# Altium PCB main_pcb_v0.PcbDoc (part 1 of 2)
Units mil, origin at the board's own origin, x right, y up, seen from the top; angles counter-clockwise.
Board outline 9550 x 4600 mil, 2 copper layers (Top Layer, Bottom Layer); 82 components, 133 nets, 564 pads, 44 vias.
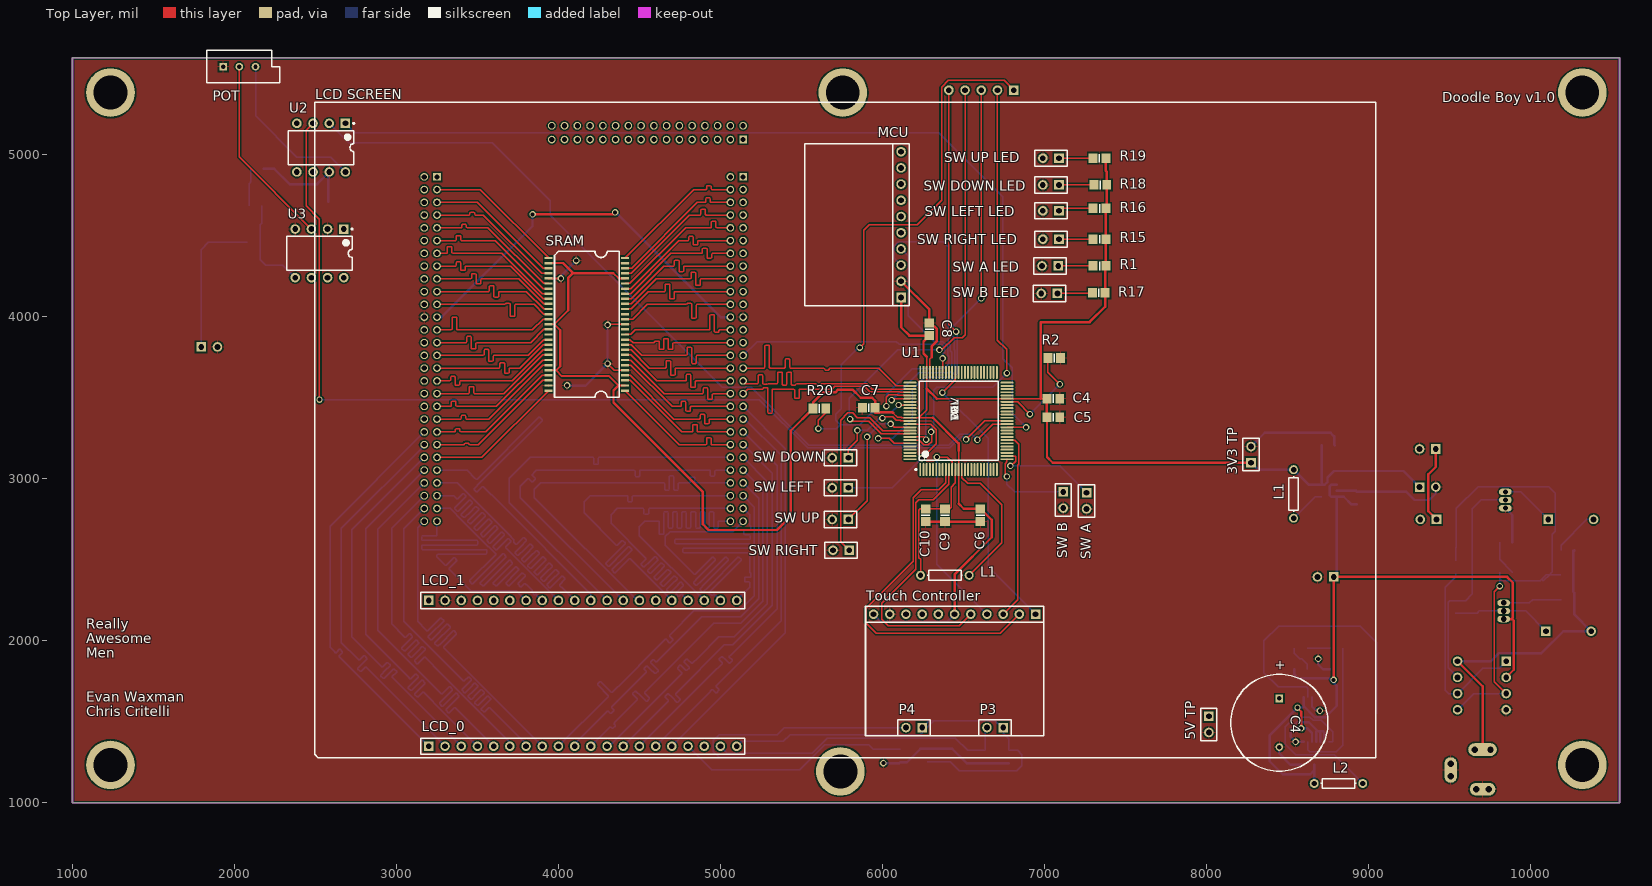
[diagram p0: Top Layer view]
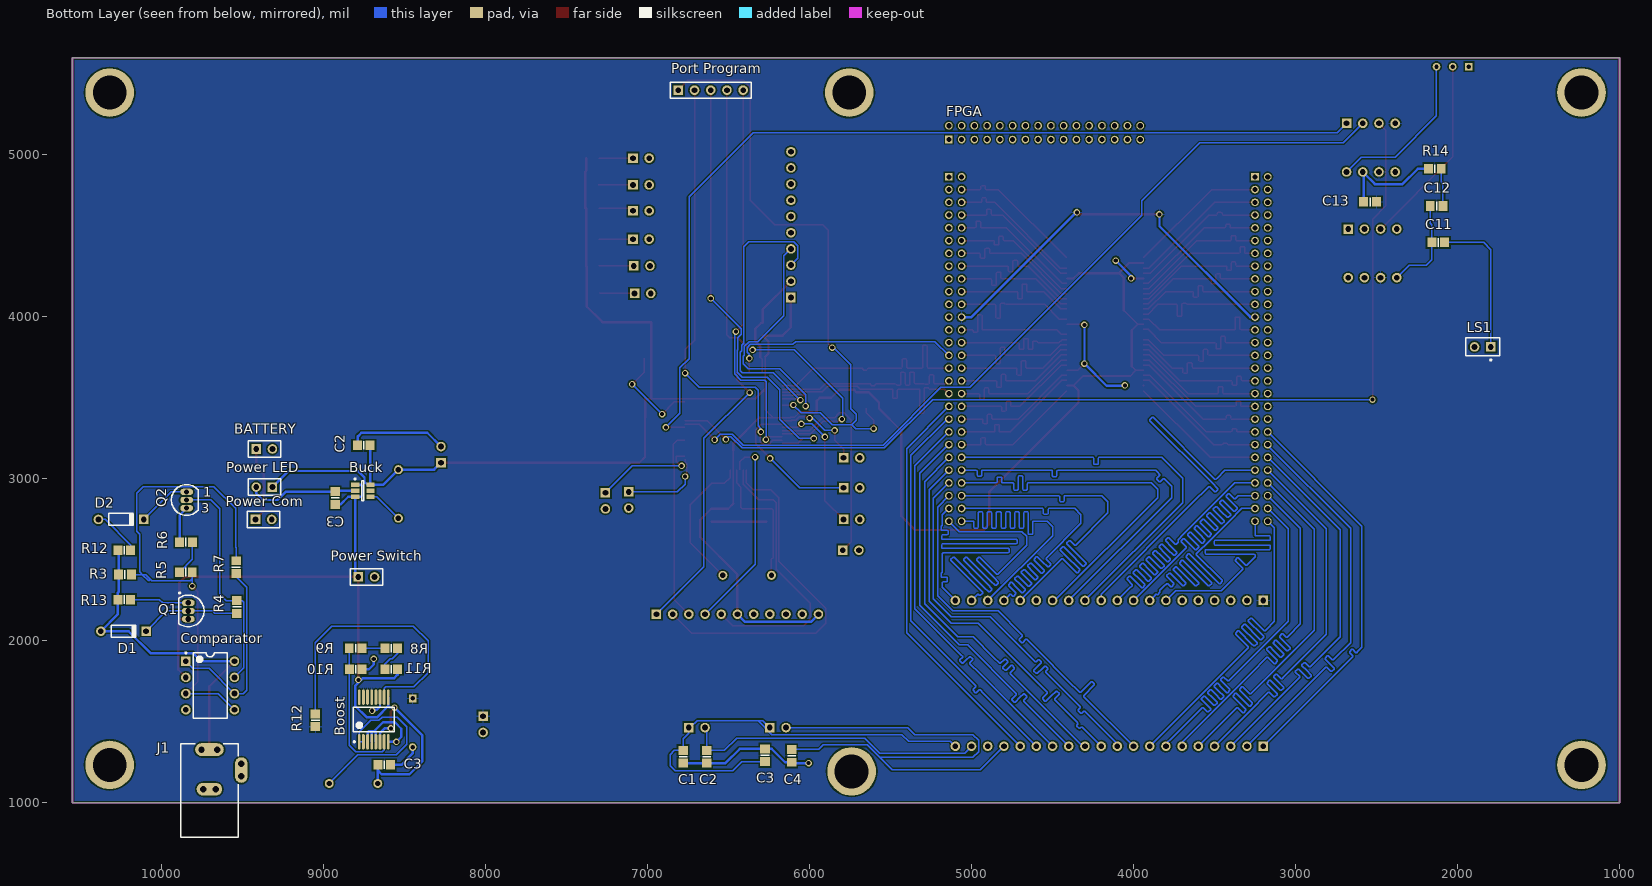
[diagram p1: Bottom Layer view, seen from below]

## Layer stack, top to bottom
Top Solder: solder mask 0.4, Solder Resist, Dk 3.5
Top Layer: signal copper 1.4
Dielectric 1: dielectric 12.6, FR-4, Dk 4.8
Bottom Layer: signal copper 1.4
Bottom Solder: solder mask 0.4, Solder Resist, Dk 3.5

## Board outline
1000,1015 1000,5600 10550,5600 10550,1000 1000,1000

## Design rules (kind name [scope] priority, off if disabled: settings)
Clearance [All] p1: gap=9 ignorepadtopadclearanceinfootprint=TRUE
HoleSize [All] p1: absolutevalues=TRUE maxlimit=240 minlimit=1 maxpercent=80.000 minpercent=20.000
MatchedLengths sram_match_length_2 [InNetClass('SRAM_net')] p1: tolerance=10 checknetsindiffpair=FALSE checkdiffpairvsdiffpair=TRUE checkxsignals=TRUE checkothers=TRUE
MatchedLengths lcd_match_length_1 [InNetClass('LCD_net')] p2: tolerance=10 checknetsindiffpair=FALSE checkdiffpairvsdiffpair=TRUE checkxsignals=TRUE checkothers=TRUE
MatchedLengths lcd_spi_match_length [InNetClass('FPGA_SPI_net')] p3: tolerance=10 checknetsindiffpair=FALSE checkdiffpairvsdiffpair=TRUE checkxsignals=TRUE checkothers=TRUE
MinimumSolderMaskSliver [All] p1 off: minsoldermaskwidth=10
PolygonConnect [All] p1: connectstyle=Relief reliefconductorwidth=10 reliefentries=4 polygonreliefangle="90 Angle" airgapwidth=10
RoutingCorners [All] p1: cornerstyle=Round minsetback=1000 maxsetback=1000
RoutingVias [All] p1: holewidth=25 width=40 viastyle="Through Hole" minholewidth=25 minwidth=40 maxholewidth=25 maxwidth=40
SMDNeckDown [InNet('3V3')] p1: percent=80.000
SilkToSolderMaskClearance [IsPad] p1 off: minsilkscreentomaskgap=2.5 clearancetoexposedcopper=TRUE
SolderMaskExpansion [All] p1: expansion=4
Width Power_common_width [InNet('Power_Common')] p1: maxlimit=15 minlimit=7 preferedwidth=15
Width 12V_width [InNet('12V')] p2: maxlimit=15 minlimit=7 preferedwidth=15
Width V_BAT_width [InNet('V_BAT')] p3: maxlimit=15 minlimit=7 preferedwidth=15
Width 3V3_width [InNet('3V3')] p4: maxlimit=15 minlimit=7 preferedwidth=15
Width [All] p5: maxlimit=15 minlimit=7 preferedwidth=8
26 further rules are at their usual default settings.

## Classes and differential pairs
net class AUTO_ROUTE_net: 3V3 12V DAC_CS DAC_DIN DAC_SCK FPGA_MISO FPGA_MOSI FPGA_SCLK FPGA_SS IMU_SCL IMU_SDA LBI NetBoost_1 NetBoost_10 NetBuck_4 NetC9_2 NetC11_1 NetC11_2 NetC12_1 NetComparator_1 NetComparator_3 NetComparator_7 NetD1_2 NetD2_1 NetD2_2 NetPOT_2 NetPOT_3 NetQ1_1 NetR1_2 NetR2_1 NetR5_1 NetR8_1 NetR8_2 NetR15_2 NetR16_2 NetR17_2 NetR18_2 NetR19_2 Power_Common RST_NMI_N SWCLKTCK SWDIOTMS switch_A switch_B switch_DOWN switch_LEFT switch_RIGHT switch_UP TDI_ADC14CLK TDO_SWO TOUCH_INT TOUCH_SCL TOUCH_SDA/CS TOUCH_SDI TOUCH_SDO V_BAT VSW XL XR YD YU
net class FPGA_SPI_net: FPGA_MISO FPGA_MOSI FPGA_SCLK FPGA_SS
net class SRAM_net: /BHE /BLE /CE /OE /WE A0 A1 A2 A3 A4 A5 A6 A7 A8 A9 A10 A11 A12 A13 A14 A15 A16 A17 A18 A19 IO0 IO1 IO2 IO3 IO4 IO5 IO6 IO7 IO8 IO9 IO10 IO11 IO12 IO13 IO14 IO15
net class LCD_net: BLUE0 BLUE1 BLUE2 BLUE3 BLUE4 BLUE5 BLUE6 BLUE7 CLK_pixel DE GREEN0 GREEN1 GREEN2 GREEN3 GREEN4 GREEN5 GREEN6 GREEN7 HSYNC ON/OFF RED0 RED1 RED2 RED3 RED4 RED5 RED6 RED7 VSYNC
component class dac_audio_out: C11 C12 C13 LS1 POT R14 U2 U3
component class MSPBreakout: C4 C5 C6 C7 C8 C9 C10 L1 MCU "Port Program" R1 R2 R15 R16 R17 R18 R19 R20 "SW A" "SW A LED" "SW B" "SW B LED" "SW DOWN" "SW DOWN LED" "SW LEFT" "SW LEFT LED" "SW RIGHT" "SW RIGHT LED" "SW UP" "SW UP LED" U1
component class BatteryRecharge2: "3V3 TP" "5V TP" BATTERY Boost Buck C2 C3 C4 Comparator D1 D2 J1 L1 L2 "Power Com" "Power LED" "Power Switch" Q1 Q2 R3 R4 R5 R6 R7 R8 R9 R10 R11 R12 R13
component class lcd_breakout: C1 C2 C3 C4 LCD_0 LCD_1 P3 P4 P? "Touch Controller"
component class fpga_sram: FPGA SRAM

## Components (designator, comment, footprint, x,y, rotation, side; value= is the part's Value field where it differs from the comment)
"3V3 TP" "V_BUCK_OUT_HEAD" HDR1X2 8275,3100 r90 top
"5V TP" "V_BOOST_OUT_HEAD" HDR1X2 8015,1535 r270 top
BATTERY "BATTERY HEAD" HDR1X2 9415.63,3185 r180 bottom
Boost "Header 8X2A" SSOP16_M 8690,1515.2 r90 bottom
Buck "Header 3X2A" SOT23-6_M 8757.76,2927.6 r180 bottom
C1 "Cap" 6-0805_M 6780,1285.63 r90 bottom value=10nF
C2 "Cap" 6-0805_M 8752.13,3207.6 r180 bottom value=10uF
C2 "Cap" 6-0805_M 6635,1285.63 r90 bottom value=10nF
C3 "Cap Pol1" 6-0805_M 8625,1235.2 r180 bottom value=10uF
C3 "Cap" 6-0805_M 8927.76,2882.6 r270 bottom value=4.7uF
C3 "Cap" 6-0805_M 6275,1294.37 r270 bottom value=10nF
C4 "Cap Pol1" RB7.6-15 8450,1495 r90 top value=270uF
C4 "Cap" 6-0805_M 7055,3496.06 r180 top value=100nF
C4 "Cap" 6-0805_M 6110,1290.63 r90 bottom value=10nF
C5 "Cap" 6-0805_M 7055,3381.06 r180 top value=100nF
C6 "Cap Pol1" 6-0805_M 6605,2776.38 r270 top value=10uF
C7 "Cap" 6-0805_M 5915,3440 r0 top value=100nF
C8 "Cap" 6-0805_M 6290,3924.37 r270 top value=100nF
C9 "Cap" 6-0805_M 6386.06,2776.38 r90 top value=100nF
C10 "Cap" 6-0805_M 6266.06,2776.38 r90 top value=4uF
C11 "Cap Pol1" 6-0805_M 2119.37,4460 r180 bottom value=270uF
C12 "Cap" 6-0805_M 2129.37,4685 r0 bottom value=0.047uF
C13 "Cap" 6-0805_M 2540,4710 r0 bottom value=0.1uF
Comparator "LT1017CN8" LT-N8 9700,1725 r180 bottom
D1 "Diode 1N914" DO-35 10235,2060 r180 bottom
D2 "Diode 1N914" DO-35 10250,2750 r180 bottom
FPGA "CoreEP3C16" CoreEP3C16 5140,4865 r180 bottom
J1 "PWR2.5" KLD-0202 9704.37,789.72 r90 bottom
L1 "Inductor" AXIAL-0.3 8537.76,2907.6 r90 top value=10uH
L1 "Inductor" AXIAL-0.3 6385,2405 r180 top value=4.7uH
L2 "Inductor" AXIAL-0.3 8815,1120.2 r0 top value=10uH
LCD_0 "Header 20" HDR1X20 3200,1350 r0 top
LCD_1 "Header 20" HDR1X20 3200,2250 r0 top
LS1 "Speaker" PIN2 1795,3815 r0 bottom
MCU "Header 10" HDR1X10 6115,4120 r90 top
P3 "Header 2" HDR1X2 6745,1465 r180 top
P4 "Header 2" HDR1X2 6245,1465 r180 top
"Port Program" "Header 5" HDR1X5 6810,5400 r180 bottom
POT "RPot_3" VR5 2030,5545 r0 top value=10K
"Power Com" "Header 2" HDR1X2 9420,2750 r180 bottom
"Power LED" "Header 2" HDR1X2 9315.63,2950 r0 bottom
"Power Switch" "Header 2" HDR1X2 8785,2395 r180 bottom
Q1 "2N3906" TO-92A 9835,2185 r0 bottom
Q2 "2N7000" SOT54 9845,2870 r180 bottom
R1 "Res1" 6-0805_M 7340,4315 r180 top value=1K
R2 "Res1" 6-0805_M 7060.63,3746.38 r0 top value=91K
R3 "Res1" 6-0805_M 10225.63,2410 r0 bottom value=5000
R4 "Res1" 6-0805_M 9535,2210 r270 bottom value=510
R5 "Res1" 6-0805_M 9850,2425 r180 bottom value=2000
R6 "Res1" 6-0805_M 9849.37,2610 r180 bottom value=560
R7 "Res1" 6-0805_M 9540,2455.63 r270 bottom value=100K
R8 "Res1" 6-0805_M 8582.13,1955.2 r180 bottom value=1M
R9 "Res1" 6-0805_M 8802.13,1955.2 r180 bottom value=470K
R10 "Res1" 6-0805_M 8800.87,1825.2 r0 bottom value=330K
R11 "Res1" 6-0805_M 8582.13,1825.2 r180 bottom value=1M
R12 "Res1" 6-0805_M 9050,1510 r90 bottom value=100K
R12 "Res1" 6-0805_M 10230,2560 r180 bottom value=1K
R13 "Res1" 6-0805_M 10230,2255 r0 bottom value=39
R14 "Res1" 6-0805_M 2140,4915 r180 bottom value=10
R15 "Res1" 6-0805_M 7340,4480 r180 top value=1K
R16 "Res1" 6-0805_M 7340,4670 r180 top value=1K
R17 "Res1" 6-0805_M 7335.63,4149.05 r180 top value=1K
R18 "Res1" 6-0805_M 7345,4815 r180 top value=1K
R19 "Res1" 6-0805_M 7339.37,4980 r180 top value=1K
R20 "Res1" 6-0805_M 5610.63,3435 r180 top value=47K
SRAM "CY7C10612G30" TSOP54 4175.28,3954.61 r270 top
"SW A" "Header 2" HDR1X2 7260,2915 r270 top
"SW A LED" "Header 2" HDR1X2 7085,4315 r180 top
"SW B" "Header 2" HDR1X2 7116.26,2920 r270 top
"SW B LED" "Header 2" HDR1X2 7080,4145 r180 top
"SW DOWN" "Header 2" HDR1X2 5790,3130 r180 top
"SW DOWN LED" "Header 2" HDR1X2 7090,4815 r180 top
"SW LEFT" "Header 2" HDR1X2 5790,2945 r180 top
"SW LEFT LED" "Header 2" HDR1X2 7090,4655 r180 top
"SW RIGHT" "Header 2" HDR1X2 5795,2560 r180 top
"SW RIGHT LED" "Header 2" HDR1X2 7090,4480 r180 top
"SW UP" "Header 2" HDR1X2 5790,2750 r180 top
"SW UP LED" "Header 2" HDR1X2 7090,4980 r180 top
"Touch Controller" "Header 11" HDR1X11 6945,2165 r180 top
U1 "XMS432P401RIPZR" PZ0100A_M 6469.8,3357.95 r90 top value=Value
U2 "LT1661" DIP-8 2535,5045 r270 top
U3 "LM386N-1" DIP-8 2525,4392.56 r270 top

## Footprints (in the part's own frame and the unit in brackets; to place one, negate y for a bottom-side part, rotate by r counter-clockwise, add the part's x,y. Pads: shape width x height; smd on the part's side, far side on the other; paste and mask are expansions set on the pad)
6-0805_M [mm] "Chip Resistor, Body 2.0x1.2mm, IPC Low Density"
  rect 1.4x1.5 smd: 1(-1,0) 2(1,0)
  silkscreen extent 0,-0.65 0,0.65, body extent -1.07,-0.7 1.07,0.7, height 0.7
AXIAL-0.3 [mm] "Axial Device, Thru-Hole; 2 Leads; 0.3 in Pin Spacing"
  round 1.4 hole 0.85: 1(-3.81,0) 2(3.81,0)
  silkscreen extent -2.77,-0.76 2.77,0.76
CoreEP3C16 [mm]
  rect 1.2x1.2 hole 0.8: 1(0,0) 57(0,5.842) 89(48,0)
  round 1.2 hole 0.8: 2(2,0) 3(0,-2) 4(2,-2) 5(0,-4) 6(2,-4) 7(0,-6) 8(2,-6) 9(0,-8) 10(2,-8) 11(0,-10) 12(2,-10) 13(0,-12) 14(2,-12) 15(0,-14) 16(2,-14) 17(0,-16) 18(2,-16) 19(0,-18) 20(2,-18) 21(0,-20) 22(2,-20) 23(0,-22) 24(2,-22) 25(0,-24) 26(2,-24) 27(0,-26) 28(2,-26) 29(0,-28) 30(2,-28) 31(0,-30) 32(2,-30) 33(0,-32) 34(2,-32) 35(0,-34) 36(2,-34) 37(0,-36) 38(2,-36) 39(0,-38) 40(2,-38) 41(0,-40) 42(2,-40) 43(0,-42) 44(2,-42) 45(0,-44) 46(2,-44) 47(0,-46) 48(2,-46) 49(0,-48) 50(2,-48) 51(0,-50) 52(2,-50) 53(0,-52) 54(2,-52) 55(0,-54) 56(2,-54) 58(0,8) 59(2,5.842) 60(2,8) 61(4,5.842) 62(4,8) 63(6,5.842) 64(6,8) 65(8,5.842) 66(8,8) 67(10,5.842) 68(10,8) 69(12,5.842) 70(12,8) 71(14,5.842) 72(14,8) 73(16,5.842) 74(16,8) 75(18,5.842) 76(18,8) 77(20,5.842) 78(20,8) 79(22,5.842) 80(22,8) 81(24,5.842) 82(24,8) 83(26,5.842) 84(26,8) 85(28,5.842) 86(28,8) 87(30,5.842) 88(30,8) 90(50,0) 91(48,-2) 92(50,-2) 93(48,-4) 94(50,-4) 95(48,-6) 96(50,-6) 97(48,-8) 98(50,-8) 99(48,-10) 100(50,-10) 101(48,-12) 102(50,-12) 103(48,-14) 104(50,-14) 105(48,-16) 106(50,-16) 107(48,-18) 108(50,-18) 109(48,-20) 110(50,-20) 111(48,-22) 112(50,-22) 113(48,-24) 114(50,-24) 115(48,-26) 116(50,-26) 117(48,-28) 118(50,-28) 119(48,-30) 120(50,-30) 121(48,-32) 122(50,-32) 123(48,-34) 124(50,-34) 125(48,-36) 126(50,-36) 127(48,-38) 128(50,-38) 129(48,-40) 130(50,-40) 131(48,-42) 132(50,-42) 133(48,-44) 134(50,-44) 135(48,-46) 136(50,-46) 137(48,-48) 138(50,-48) 139(48,-50) 140(50,-50) 141(48,-52) 142(50,-52) 143(48,-54) 144(50,-54)
DIP-8 [mm] "DIP; 8 Leads; Row Spacing 7.62 mm; Pitch 2.54 mm"
  rect 1.5x1.5 hole 0.9: 1(-3.81,3.81)
  round 1.5 hole 0.9: 2(-3.81,1.27) 3(-3.81,-1.27) 4(-3.81,-3.81) 5(3.81,-3.81) 6(3.81,-1.27) 7(3.81,1.27) 8(3.81,3.81)
  silkscreen extent -3.93,-5.15 2.65,5.24, body extent -3.6,-5.15 3.6,5.15, height 5.08
DO-35 [mm] "Diode, Axial; Body 3.8 x 1.9 mm (LxDia. max), Lead Dia. 0.53 mm (max)"
  round 1.5 hole 0.9: 1(-3.55,0)
  rect 1.5x1.5 hole 0.9: 2(3.55,0)
  silkscreen extent -1.95,-0.95 2.05,0.95
HDR1X2 [mm] "Connector; Header; 2 Position"
  rect 1.5x1.5 hole 0.9: 1(0,0)
  round 1.5 hole 0.9: 2(2.54,0)
  silkscreen extent -1.27,-1.27 3.81,1.27
HDR1X5 [mm] "Connector; Header; 5 Position"
  rect 1.5x1.5 hole 0.9: 1(0,0)
  round 1.5 hole 0.9: 2(2.54,0) 3(5.08,0) 4(7.62,0) 5(10.16,0)
  silkscreen extent -1.27,-1.27 11.43,1.27
HDR1X10 [mm] "Connector; Header; 10 Position"
  rect 1.5x1.5 hole 0.9: 1(0,0)
  round 1.5 hole 0.9: 2(2.54,0) 3(5.08,0) 4(7.62,0) 5(10.16,0) 6(12.7,0) 7(15.24,0) 8(17.78,0) 9(20.32,0) 10(22.86,0)
  silkscreen extent -1.27,-1.27 24.13,1.27
HDR1X11 [mm] "Connector; Header; 11 Position"
  rect 1.5x1.5 hole 0.9: 1(0,0)
  round 1.5 hole 0.9: 2(2.54,0) 3(5.08,0) 4(7.62,0) 5(10.16,0) 6(12.7,0) 7(15.24,0) 8(17.78,0) 9(20.32,0) 10(22.86,0) 11(25.4,0)
  silkscreen extent -1.27,-1.27 26.67,1.27
HDR1X20 [mm] "Connector; Header; 20 Position"
  rect 1.5x1.5 hole 0.9: 1(0,0)
  round 1.5 hole 0.9: 2(2.54,0) 3(5.08,0) 4(7.62,0) 5(10.16,0) 6(12.7,0) 7(15.24,0) 8(17.78,0) 9(20.32,0) 10(22.86,0) 11(25.4,0) 12(27.94,0) 13(30.48,0) 14(33.02,0) 15(35.56,0) 16(38.1,0) 17(40.64,0) 18(43.18,0) 19(45.72,0) 20(48.26,0)
  silkscreen extent -1.27,-1.27 49.53,1.27
KLD-0202 [mm] "DC Power Jack, 2.5mm, KLD Series, PCB Mount"
  oval 2x4.5 all layers, no hole: 1(13.7,0)
  round 1.5 hole 1: 1A(13.7,-1.25) 1B(13.7,1.25) 2A(7.5,-1) 2B(7.5,1) 3A(9.5,-5) 3B(11.5,-5)
  oval 2x4 all layers, no hole: 2(7.5,0)
  oval 4x2 all layers, no hole: 3(10.5,-5)
  silkscreen extent 0,-4.5 14.6,4.5
LT-N8 [mm] "DIP, 8-Leads, Body 10.16x6.477mm, Pitch 2.54mm"
  rect 1.5x1.5 hole 0.9: 1(-3.81,3.81)
  round 1.5 hole 0.9: 2(-3.81,1.27) 3(-3.81,-1.27) 4(-3.81,-3.81) 5(3.81,-3.81) 6(3.81,-1.27) 7(3.81,1.27) 8(3.81,3.81)
  silkscreen extent -3.94,-5.1 2.65,5.23, body extent -3.95,-5.07 3.95,5.07, height 3.94
PIN2 [mm] "Photosensitive Diode; 2 Leads"
  rect 1.5x1.5 hole 0.9: 1(0,0)
  round 1.5 hole 0.9: 2(2.54,0)
  silkscreen extent -1.4,-1.4 3.94,2.17
PZ0100A_M [mm]
  oval 2.05x0.3 smd paste+0 mask+0.051: 1(-7.625,6) 2(-7.625,5.5) 3(-7.625,5) 4(-7.625,4.5) 5(-7.625,4) 6(-7.625,3.5) 7(-7.625,3) 8(-7.625,2.5) 9(-7.625,2) 10(-7.625,1.5) 11(-7.625,1) 12(-7.625,0.5) 13(-7.625,0) 14(-7.625,-0.5) 15(-7.625,-1) 16(-7.625,-1.5) 17(-7.625,-2) 18(-7.625,-2.5) 19(-7.625,-3) 20(-7.625,-3.5) 21(-7.625,-4) 22(-7.625,-4.5) 23(-7.625,-5) 24(-7.625,-5.5) 25(-7.625,-6) 51(7.625,-6) 52(7.625,-5.5) 53(7.625,-5) 54(7.625,-4.5) 55(7.625,-4) 56(7.625,-3.5) 57(7.625,-3) 58(7.625,-2.5) 59(7.625,-2) 60(7.625,-1.5) 61(7.625,-1) 62(7.625,-0.5) 63(7.625,0) 64(7.625,0.5) 65(7.625,1) 66(7.625,1.5) 67(7.625,2) 68(7.625,2.5) 69(7.625,3) 70(7.625,3.5) 71(7.625,4) 72(7.625,4.5) 73(7.625,5) 74(7.625,5.5) 75(7.625,6)
  oval 0.3x2.05 smd paste+0 mask+0.051: 26(-6,-7.625) 27(-5.5,-7.625) 28(-5,-7.625) 29(-4.5,-7.625) 30(-4,-7.625) 31(-3.5,-7.625) 32(-3,-7.625) 33(-2.5,-7.625) 34(-2,-7.625) 35(-1.5,-7.625) 36(-1,-7.625) 37(-0.5,-7.625) 38(0,-7.625) 39(0.5,-7.625) 40(1,-7.625) 41(1.5,-7.625) 42(2,-7.625) 43(2.5,-7.625) 44(3,-7.625) 45(3.5,-7.625) 46(4,-7.625) 47(4.5,-7.625) 48(5,-7.625) 49(5.5,-7.625) 50(6,-7.625) 76(6,7.625) 77(5.5,7.625) 78(5,7.625) 79(4.5,7.625) 80(4,7.625) 81(3.5,7.625) 82(3,7.625) 83(2.5,7.625) 84(2,7.625) 85(1.5,7.625) 86(1,7.625) 87(0.5,7.625) 88(0,7.625) 89(-0.5,7.625) 90(-1,7.625) 91(-1.5,7.625) 92(-2,7.625) 93(-2.5,7.625) 94(-3,7.625) 95(-3.5,7.625) 96(-4,7.625) 97(-4.5,7.625) 98(-5,7.625) 99(-5.5,7.625) 100(-6,7.625)
  silkscreen extent -7.75,-6.2 6.2,6.82, body extent 0,0 0.25,0.25, height 0.25
RB7.6-15 [mm] "Polarized Capacitor (Radial); 2 Leads"
  rect 1.2x1.2 hole 0.7: 1(3.81,0)
  round 1.2 hole 0.7: 2(-3.81,0)
  silkscreen extent -7.62,-7.62 7.62,7.62
SOT23-6_M [mm] "SOT23, 6-Leads, Body 2.9x1.6mm, Pitch 0.95mm, Lead Span 2.7mm, IPC Low Density"
  rect 1.3x0.7 smd: 1(-1.2,0.95) 2(-1.2,0) 3(-1.2,-0.95) 4(1.2,-0.95) 5(1.2,0) 6(1.2,0.95)
  silkscreen extent -1.33,-1.55 0.15,1.97, body extent -0.9,-1.55 0.9,1.55, height 1.45
SOT54 [mm] "TO, Flat Index; 3 In-Line, Axial Leads; Body Dia. 4.6mm; Leads 0.48 x 0.45 mm (max)"
  oval 2x1 hole 0.8: 1(0,1.27) 2(0,0) 3(0,-1.27)
  silkscreen extent -2.4,-2.4 1.8,2.4
SSOP16_M [mm] "SOP, 16-Leads, Body 6.2x5.3mm, Pitch 0.65mm, IPC Low Density"
  oval 2.4x0.45 smd: 1(-3.5,2.275) 2(-3.5,1.625) 3(-3.5,0.975) 4(-3.5,0.325) 5(-3.5,-0.325) 6(-3.5,-0.975) 7(-3.5,-1.625) 8(-3.5,-2.275) 9(3.5,-2.275) 10(3.5,-1.625) 11(3.5,-0.975) 12(3.5,-0.325) 13(3.5,0.325) 14(3.5,0.975) 15(3.5,1.625) 16(3.5,2.275)
  silkscreen extent -3.62,-3.25 1.9,3.25, body extent -2.7,-3.25 2.7,3.25, height 2
TO-92A [mm] "TO, Flat Index; 3 In-Line, Axial Leads; Body Dia. 4.5mm; Leads 0.51 x 0.48 mm (max)"
  oval 2x1 hole 0.9: 1(0,-1.27) 2(0,0) 3(0,1.27)
  silkscreen extent -2.48,-2.95 1.5,2.48, body extent -2.48,-2.5 1.5,2.5, height 6.86
TSOP54 [mm]
  rect 0.375x1.27 smd: 1(-10.4,-6) 2(-9.6,-6) 3(-8.8,-6) 4(-8,-6) 5(-7.2,-6) 6(-6.4,-6) 7(-5.6,-6) 8(-4.8,-6) 9(-4,-6) 10(-3.2,-6) 11(-2.4,-6) 12(-1.6,-6) 13(-0.8,-6) 14(0,-6) 15(0.8,-6) 16(1.6,-6) 17(2.4,-6) 18(3.2,-6) 19(4,-6) 20(4.8,-6) 21(5.6,-6) 22(6.4,-6) 23(7.2,-6) 24(8,-6) 25(8.8,-6) 26(9.6,-6) 27(10.4,-6) 28(10.4,6) 29(9.6,6) 30(8.8,6) 31(8,6) 32(7.2,6) 33(6.4,6) 34(5.6,6) 35(4.8,6) 36(4,6) 37(3.2,6) 38(2.4,6) 39(1.6,6) 40(0.8,6) 41(0,6) 42(-0.8,6) 43(-1.6,6) 44(-2.4,6) 45(-3.2,6) 46(-4,6) 47(-4.8,6) 48(-5.6,6) 49(-6.4,6) 50(-7.2,6) 51(-8,6) 52(-8.8,6) 53(-9.6,6) 54(-10.4,6)
  silkscreen extent -11.43,-5.08 11.43,5.08
VR5 [mm] "Thru-Hole; 3 Leads"
  rect 1.2x1.2 hole 0.7: 1(-2.54,0)
  round 1.2 hole 0.7: 2(0,0) 3(2.54,0)
  silkscreen extent -5.08,-2.54 6.35,2.54

## Part data
"3V3 TP" "5V TP" BATTERY: library part "Header 2", "Header, 2-Pin", LatestRevisionDate=17-Jul-2002, LatestRevisionNote="Re-released for DXP Platform.", Publisher="Altium Limited"
Boost: "Header, 8-Pin, Dual row", LatestRevisionDate=17-Jul-2002, LatestRevisionNote="Re-released for DXP Platform.", Publisher="Altium Limited"
Buck: "Header, 3-Pin, Dual row", LatestRevisionDate=17-Jul-2002, LatestRevisionNote="Re-released for DXP Platform.", Publisher="Altium Limited"
C1 C2 C2 C3 C3 C4 C4 C5 C7 C8 C9 C10 C12 C13: "Capacitor", LatestRevisionDate=17-Jul-2002, LatestRevisionNote="Re-released for DXP Platform.", PackageDescription="Radial Cap, Thru-Hole; 2 Leads; 0.3 in Pin Spacing", PackageReference=RAD-0.3, Published=8-Jun-2000, Publisher="Altium Limited"
C3 C4 C6 C11: "Polarized Capacitor (Radial)", LatestRevisionDate=17-Jul-2002, LatestRevisionNote="Re-released for DXP Platform.", PackageDescription="Polarized Capacitor (Radial); 2 Leads", PackageReference=RB7.6-15, Published=8-Jun-2000, Publisher="Altium Limited"
Comparator: "Micropower Comparator, 2 Channels, 1.2 to 40 V, 0 to +70 degC, 8-pin PDIP (N8)", Generic Part Number=LT1017, Manufacturer="Linear Technology", Supplier Part Number 1=LT1017CN8-ND, Supply Current (uA) Guaranteed=60, Supply Current (uA) Typical=30, Supply Voltage Range="1.2 to 40 V", Channels (#)=2, ComponentLink1Description="Manufacturer URL", ComponentLink1URL=http://www.linear.com/, ComponentLink2Description=Datasheet, ComponentLink2URL=http://cds.linear.com/docs/en/datasheet/10178ff.pdf, ComponentLink3Description="Package Specification", ComponentLink3URL=http://cds.linear.com/docs/en/packaging/05081510_I_N8.pdf, DatasheetVersion="Rev F", Features=Comparator, Mounting Technology="Through Hole", PackageDescription="8-Pin PDIP, Row Spacing 7.62, Pitch 2.54 mm", PackageReference=N8, PartNumber=LT1017CN8, Prop Delay (us)=22, RoHS=N, Supplier 1=Digi-Key, Supplier 2=Newark, Supplier Part Number 2=57M0864, Vos (mV) Guaranteed=1, Vos (mV) Typical=0.4, Vs Max (V)=40, Vs Min (V)=1.2
D1 D2: "High Conductance Fast Diode", Code_JEDEC=DO-204-AH, ComponentLink1Description="Manufacturer Link", ComponentLink1URL=http://www.fairchildsemi.com/, ComponentLink2Description=Datasheet, ComponentLink2URL=http://www.fairchildsemi.com/ds/1N%2F1N4448.pdf, DatasheetVersion=1997, LatestRevisionDate=17-Jul-2002, LatestRevisionNote="Re-released for DXP Platform.", PackageDescription="Diode, Axial; Body 3.8 x 1.9 mm (LxDia. max), Lead Dia. 0.53 mm (max)", PackageReference=DO-35, Published=8-Jun-2000, Publisher="Altium Limited"
J1: "Low Voltage Power Supply Connector", ComponentLink1Description="Manufacturer Link", ComponentLink1URL=http://domino.kycon.com/internet/Products.html, DatasheetDocument=09-May-2002, Published=17-Dec-2003, Publisher="Altium Limited"
LCD_0 LCD_1: "Header, 20-Pin", LatestRevisionDate=17-Jul-2002, LatestRevisionNote="Re-released for DXP Platform.", Publisher="Altium Limited"
LS1: "Loudspeaker", LatestRevisionDate=17-Jul-2002, LatestRevisionNote="Re-released for DXP Platform.", PackageReference=PIN2, Published=24-Mar-1999, Publisher="Altium Limited"
MCU: "Header, 10-Pin", LatestRevisionDate=17-Jul-2002, LatestRevisionNote="Re-released for DXP Platform.", Publisher="Altium Limited"
P3 P4 "Power Com" "Power LED" "Power Switch" "SW A" "SW A LED" "SW B" "SW B LED" "SW DOWN" "SW DOWN LED" "SW LEFT" "SW LEFT LED" "SW RIGHT" "SW RIGHT LED" "SW UP" "SW UP LED": "Header, 2-Pin", LatestRevisionDate=17-Jul-2002, LatestRevisionNote="Re-released for DXP Platform.", Publisher="Altium Limited"
"Port Program": "Header, 5-Pin", LatestRevisionDate=17-Jul-2002, LatestRevisionNote="Re-released for DXP Platform.", Publisher="Altium Limited"
POT: library part RPot, "Potentiometer", LatestRevisionDate=17-Jul-2002, LatestRevisionNote="Re-released for DXP Platform.", Published=8-Jun-2000, Publisher="Altium Limited", Set Position=0.5, Sim Note="Enter the Resistance value and the set point into parameter fields."
Q1: "PNP General Purpose Amplifier", ComponentLink1Description="Manufacturer Link", ComponentLink1URL=http://www.fairchildsemi.com/, ComponentLink2Description=Datasheet, ComponentLink2URL=http://www.fairchildsemi.com/ds/2N%2F2N3906.pdf, DatasheetVersion=1997, LatestRevisionDate=15-Jan-2003, LatestRevisionNote="PCB Footprint 'BCY-W3/D4.7' replaced", PackageDescription="TO, Flat Index; 3 In-Line, Axial Leads; Body Dia. 4.5mm; Leads 0.51 x 0.48 mm (max)", PackageReference=TO-92A, PackageVersion=Sep-1998, Published=8-Jun-2000, Publisher="Altium Limited"
Q2: "N-channel Enhancement Mode Field-effect Transistor", Code_JEDEC=TO-92, Code_JEITA=SC-43, ComponentLink1Description="Manufacturer Link", ComponentLink1URL=http://www.semiconductors.philips.com/, ComponentLink2Description=Datasheet, ComponentLink2URL=http://www.semiconductors.philips.com/acrobat/datasheets/2N7000-03.pdf, DatasheetVersion=19-May-2000, LatestRevisionDate=12-Dec-2006, LatestRevisionNote="Footprint pad sequence fixed.", PackageDescription="Plastic Single-Ended Leaded (through hole) package; 3 Leads (TO-92)", PackageReference=SOT54, PackageVersion=Feb-1997, Published=17-Sep-2003, Publisher="Altium Limited"
R1 R2 R3 R4 R5 R6 R7 R8 R9 R10 R11 R12 R12 R13 R14 R15 R16 R17 R18 R19 R20: "Resistor", LatestRevisionDate=17-Jul-2002, LatestRevisionNote="Re-released for DXP Platform.", PackageDescription="Axial Device, Thru-Hole; 2 Leads; 0.3 in Pin Spacing", PackageReference=AXIAL-0.3, Published=8-Jun-2000, Publisher="Altium Limited"
"Touch Controller": "Header, 11-Pin", LatestRevisionDate=17-Jul-2002, LatestRevisionNote="Re-released for DXP Platform.", Publisher="Altium Limited"
U1: "Imported", Manufacturer="Texas Instruments", CompType=IC, MountType=SMT, PackageReference=PZ0100A, PartNumber=XMS432P401RIPZR, PIN_COUNT=100, RefDes=RefDes, TYPE=TYPE
U3: "Low-Voltage Audio Power Amplifier", PackageDocument=Sep-1997, DatasheetDocument=Sep-1997, PackageReference=N08E, Published=15-Apr-2002, Publisher="Altium Limited"
L1 L1 L2: Code_IEC=1005, Code_JEITA=0402, LatestRevisionDate=29-May-2009, LatestRevisionNote="IPC-7351 Footprint Added.", PackageDescription="Chip Inductor", PackageReference=0402-A, Published=8-Jun-2000, Publisher="Altium Limited"

## Free pads (board coordinates)
  round 300 hole 209: 1(10320,5385) 2(10320,1235) 3(1235,1235) 4(1235,5385) 5(5755,5385) 6(5740,1195)

## Via types
v1: diameter 40, hole 25, Top Layer to Bottom Layer, 44 vias

## Nets (pads, with @x,y where several pads share a name; then routed paths per layer and width w, separated by ;. In a path a pad name is that pad's centre, name@x,y a point inside that pad or via, vN(x,y) a via of type N, cw(c..) or ccw(c..) an arc to the next point about the centre after c; other vN are vias at no path point)
3V3: "3V3 TP.1" "Power LED.1" "Touch Controller.6" "Touch Controller.11" Buck.6 C2.2@8712.76,3207.6 C4.2@7015.63,3496.06 C5.2 C6.1 C7.2 C8.2 L1.2@8537.76,3057.6 MCU.1 R1.1 R15.1 R16.1 R17.1 R18.1 R19.1 R20.2 SRAM.2 SRAM.14 SRAM.23 SRAM.29 SRAM.50 U1.13 U1.45 U1.73 U1.87 | length 13734.8
  Top Layer w9.45: 6065.68,3407.27 6092.23,3380.72 6116.01,3380.72 6119.1,3377.64 U1.87@6169.61,3377.64 6224.64,3377.64 ; 6272.95,3754.95 U1.73@6272.95,3658.15 6272.95,3558.09 6272.95,3425.95 6224.64,3377.64 ; 6311.81,3377.64 6224.64,3377.64 ; 6335.29,3495.75 U1.45@6770,3495.75 6824,3495.75 6824.32,3496.06 6977,3496.06 7015,3496.06 C4.2@7015.63,3496.06 ; 6469.8,2848 U1.13@6469.8,3057.76 6469.8,3173
  Top Layer w11: SRAM.2@3939.06,4332.56 3972.44,4332.56
  Top Layer w11.81: SRAM.23@3939.06,3671.14 3985,3671.14 ; SRAM.14@3939.06,3954.61 3974.61,3954.61 ; 3972.44,4332.56 4028.44,4332.56 ; 4010,3696.14 3985,3671.14 ; 4010,3919.21 3974.61,3954.61 ; 4060,4040 3974.61,3954.61 ; 4338.66,4271 4371.59,4238.07 SRAM.50@4411.5,4238.07 ; SRAM.29@4411.5,3576.65 4371,3576.65 4312.65,3635 4021.14,3635 3985,3671.14
  Top Layer w15: 4010,3696.14 4010,3919.21 ; 4028.44,4332.56 4090,4271 ; 4060,4040 4060,4241 4090,4271 ; 4338.66,4271 4090,4271 ; 4371,3576.65 4340,3545.65 4340,3472 4892,2920 4892,2720 4927,2685 5348,2685 5433.8,2770.8 5433.8,3297.54 R20.2@5571.26,3435 5571.26,3472.26 5633.51,3534.51 5709.51,3534.51 5726.5,3551.5 5815.74,3551.5 5866.24,3501 5936,3501 5954.37,3482.63 C7.2@5954.37,3440 5954.37,3407.27 5980.65,3407.27 5984.88,3411.5 6061.45,3411.5 6065.68,3407.27 ; MCU.1@6115,4120 6115,3936 6166,3885 C8.2@6290,3885 6253.27,3848.27 6253.27,3774.64 6272.95,3754.95 ; 6272.95,3558.09 6335.29,3495.75 ; 6311.81,3377.64 6469.8,3219.65 6469.8,3173 ; 6445,2165 6445,2410 6675,2640 6675,2747.43 6606.68,2815.75 C6.1@6605,2815.75 6502.06,2815.75 6469.8,2848 ; 6977,3496.06 6977,3968 7279,3968 7375,4064 R17.1@7375,4149.05 7375,4313 7379.37,4313 R1.1@7379.37,4315 R15.1@7379.37,4480 R16.1@7379.37,4670 7385,4670 7385,4815 R18.1@7384.37,4815 7384.37,4895.63 7378.74,4901.26 R19.1@7378.74,4980 ; C4.2@7015,3496.06 7015,3381.06 C5.2@7015.63,3381.06 7015.63,3136 7051.63,3100 8275,3100
  Bottom Layer w15: 5945,2165 5992,2118 6398,2118 6445,2165 ; 8275,3100 8317.4,3057.6 L1.2@8537.76,3057.6 8630.35,2965 Buck.6@8710.51,2965 Buck.6@8713,2965 ; C2.2@8712.76,3207.6 8712.76,3159.24 8713,3159 Buck.6@8713,2965 ; 9315.63,2950 9216.63,3049 8788,3049 8747,3008 8747,2982 8730,2965 Buck.6@8713,2965
5V: "5V TP.1" Boost.13 Boost.14 Boost.15 C4.1@8450,1645 C13.1 FPGA.24 FPGA.111 LCD_1.1 R12.1@9050,1470.63 U2.4 U2.6 U3.6 | length 2387.6
  Top Layer w15: v1(3840,4632.98) 4337.98,4632.98 v1(4350,4645)
  Bottom Layer w15: FPGA.111@3250.24,3998.86 3278.86,3998.86 3840,4560 v1(3840,4632.98) ; v1@4352.5,4647.5 5001.14,3998.86 FPGA.24@5061.26,3998.86
12V: Comparator.8 D1.1 J1.1 J1.1A J1.1B R3.2 R12.1@10269.37,2560 R13.2 | length 2110.3
  Top Layer w15: Comparator.8@9550,1875 9704.37,1720.63 J1.1@9704.37,1329.09 J1.1B@9753.58,1329.09
  Bottom Layer w15: Comparator.8@9550,1875 9756,1875 9806,1925 10068,1925 10203,2060 D1.1@10374.76,2060 10269.37,2165.39 R13.2@10269.37,2255 10269.37,2299 10265,2303.37 R3.2@10265,2410 10265,2558 10269.37,2558 R12.1@10269.37,2560
/BHE: FPGA.109 SRAM.12 | length 863
  Top Layer w8: FPGA.109@3250.24,4077.6 3660,4077.6 3669.8,4077.6 3674,4081.8 3678.2,4086 3697.8,4086 3702,4081.8 3702,4077.6 3702,4008.16 3706.2,4003.96 3725.8,4003.96 3730,4008.16 3730,4073.4 3734.2,4077.6 3850,4077.6 3910,4017.6 SRAM.12@3939.06,4017.6
/BLE: FPGA.26 SRAM.39 | length 863
  Top Layer w8: SRAM.39@4411.5,3891.61 4446.61,3891.61 4475.12,3920.12 4540,3920.12 4665,3920.12 4780,3920.12 4930.8,3920.12 4935,3924.32 4935,4009.33 4939.2,4013.53 4958.8,4013.53 4963,4009.33 4963,3920.12 4963,3909.64 4967.2,3905.44 4986.8,3905.44 4991,3909.64 4991,3915.92 4995.2,3920.12 5005,3920.12 FPGA.26@5061.26,3920.12
/CE: FPGA.113 SRAM.13 | length 863
  Top Layer w8: FPGA.113@3250.24,3920.12 3330,3920.12 3339.8,3920.12 3344,3924.32 3344,3994.26 3348.2,3998.46 3367.8,3998.46 3372,3994.26 3372,3924.32 3376.2,3920.12 3515,3920.12 3838.94,3920.12 3904.92,3986.1 SRAM.13@3939.06,3986.1
/OE: FPGA.22 SRAM.42 | length 863
  Top Layer w8: SRAM.42@4411.5,3986.1 4457.16,3986.1 4548.66,4077.6 4780,4077.6 4789.8,4077.6 4794,4081.8 4798.2,4086 4817.8,4086 4822,4081.8 4822,4077.6 4822,3995.15 4826.2,3990.95 4845.8,3990.95 4850,3995.15 4850,4073.4 4854.2,4077.6 4935,4077.6 FPGA.22@5061.26,4077.6
/WE: FPGA.115 SRAM.15 | length 863
  Top Layer w8: FPGA.115@3250.24,3841.38 3420,3841.38 3429.8,3841.38 3434,3845.58 3434,3875.95 3438.2,3880.15 3457.8,3880.15 3462,3875.95 3462,3841.38 3462,3806.81 3466.2,3802.61 3485.8,3802.61 3490,3806.81 3490,3837.18 3494.2,3841.38 3640,3841.38 3827.68,3841.38 3909.41,3923.11 SRAM.15@3939.06,3923.11
A0: FPGA.107 SRAM.11 | length 863
  Top Layer w8: FPGA.107@3250.24,4156.34 3560,4156.34 3569.8,4156.34 3574,4160.54 3574,4188.27 3578.2,4192.47 3597.8,4192.47 3602,4188.27 3602,4156.34 3602,4124.41 3606.2,4120.21 3625.8,4120.21 3630,4124.41 3630,4152.14 3634.2,4156.34 3730,4156.34 3800.58,4156.34 3907.82,4049.09 SRAM.11@3939.06,4049.09
A1: FPGA.105 SRAM.10 | length 863
  Top Layer w8: FPGA.105@3250.24,4235.08 3450,4235.08 3459.8,4235.08 3464,4239.28 3464,4262.11 3468.2,4266.31 3487.8,4266.31 3492,4262.11 3492,4235.08 3492,4208.04 3496.2,4203.84 3515.8,4203.84 3520,4208.04 3520,4230.88 3524.2,4235.08 3660,4235.08 3754.92,4235.08 3909.41,4080.59 SRAM.10@3939.06,4080.59
A2: FPGA.103 SRAM.9 | length 863
  Top Layer w8: FPGA.103@3250.24,4313.82 3355,4313.82 3364.8,4313.82 3369,4318.02 3369,4335.96 3373.2,4340.16 3392.8,4340.16 3397,4335.96 3397,4313.82 3397,4291.68 3401.2,4287.48 3420.8,4287.48 3425,4291.68 3425,4309.62 3429.2,4313.82 3585,4313.82 3705.18,4313.82 3906.91,4112.09 SRAM.9@3939.06,4112.09
A3: FPGA.101 SRAM.8 | length 863
  Top Layer w8: FPGA.101@3250.24,4392.56 3300,4392.56 3309.8,4392.56 3314,4396.76 3314,4428.8 3318.2,4433 3337.8,4433 3342,4428.8 3342,4396.76 3346.2,4392.56 3455,4392.56 3651.5,4392.56 3900.47,4143.58 SRAM.8@3939.06,4143.58
A4: FPGA.99 SRAM.7 | length 863
  Top Layer w8: FPGA.99@3250.24,4471.3 3355,4471.3 3364.8,4471.3 3369,4475.5 3369,4497.75 3373.2,4501.95 3392.8,4501.95 3397,4497.75 3397,4475.5 3401.2,4471.3 3515,4471.3 3608.7,4471.3 3904.92,4175.08 SRAM.7@3939.06,4175.08
A5: FPGA.12 SRAM.48 | length 863
  Top Layer w8: SRAM.48@4411.5,4175.08 4445.08,4175.08 4741.3,4471.3 4790,4471.3 4799.8,4471.3 4804,4475.5 4804,4493.42 4808.2,4497.62 4827.8,4497.62 4832,4493.42 4832,4471.3 4832,4449.18 4836.2,4444.98 4855.8,4444.98 4860,4449.18 4860,4467.1 4864.2,4471.3 4890,4471.3 FPGA.12@5061.26,4471.3
A6: FPGA.14 SRAM.47 | length 863
  Top Layer w8: SRAM.47@4411.5,4143.58 4445,4143.58 4693.98,4392.56 4875,4392.56 4884.8,4392.56 4889,4396.76 4889,4419.57 4893.2,4423.77 4912.8,4423.77 4917,4419.57 4917,4392.56 4917,4365.54 4921.2,4361.34 4940.8,4361.34 4945,4365.54 4945,4388.36 4949.2,4392.56 4980,4392.56 FPGA.14@5061.26,4392.56
A7: FPGA.16 SRAM.46 | length 863
  Top Layer w8: SRAM.46@4411.5,4112.09 4448.09,4112.09 4649.82,4313.82 4702.32,4313.82 4712.12,4313.82 4716.32,4318.02 4716.32,4345.72 4720.52,4349.92 4740.12,4349.92 4744.32,4345.72 4744.32,4313.82 4744.32,4281.91 4748.52,4277.71 4768.12,4277.71 4772.32,4281.91 4772.32,4309.62 4776.52,4313.82 4860,4313.82 FPGA.16@5061.26,4313.82
A8: FPGA.18 SRAM.45 | length 863
  Top Layer w8: SRAM.45@4411.5,4080.59 4448.68,4080.59 4603.16,4235.08 4805,4235.08 4814.8,4235.08 4819,4239.28 4819,4271.88 4823.2,4276.08 4842.8,4276.08 4847,4271.88 4847,4235.08 4847,4198.28 4851.2,4194.08 4870.8,4194.08 4875,4198.28 4875,4230.88 4879.2,4235.08 4925,4235.08 FPGA.18@5061.26,4235.08
A9: FPGA.20 SRAM.44 | length 863
  Top Layer w8: SRAM.44@4411.5,4049.09 4448.09,4049.09 4555.33,4156.34 4645,4156.34 4654.8,4156.34 4659,4160.54 4659,4197.41 4663.2,4201.61 4682.8,4201.61 4687,4197.41 4687,4156.34 4687,4115.26 4691.2,4111.06 4710.8,4111.06 4715,4115.26 4715,4156.34 FPGA.20@5061.26,4156.34
A10: FPGA.28 SRAM.38 | length 863
  Top Layer w8: SRAM.38@4411.5,3860.12 4441.57,3860.12 4460.31,3841.38 4580,3841.38 4589.8,3841.38 4594,3845.58 4598.2,3849.78 4617.8,3849.78 4622,3845.58 4622,3841.38 4622,3804.86 4626.2,3800.66 4645.8,3800.66 4650,3804.86 4650,3841.38 4650,3862.39 4654.2,3866.59 4673.8,3866.59 4678,3862.39 4678,3841.38 4678,3804.86 4682.2,3800.66 4701.8,3800.66 4706,3804.86 4706,3837.18 4710.2,3841.38 4770,3841.38 FPGA.28@5061.26,3841.38
A11: FPGA.30 SRAM.37 | length 863
  Top Layer w8: SRAM.37@4411.5,3828.62 4449.03,3828.62 4515.01,3762.64 4780,3762.64 4789.8,3762.64 4794,3766.84 4794,3808.6 4798.2,3812.8 4817.8,3812.8 4822,3808.6 4822,3762.64 4822,3716.67 4826.2,3712.47 4845.8,3712.47 4850,3716.67 4850,3758.44 4854.2,3762.64 4905,3762.64 FPGA.30@5061.26,3762.64
A12: FPGA.32 SRAM.36 | length 863
  Top Layer w8: SRAM.36@4411.5,3797.13 4447.87,3797.13 4561.1,3683.9 4650,3683.9 4659.8,3683.9 4664,3688.1 4664,3724.97 4668.2,3729.17 4687.8,3729.17 4692,3724.97 4692,3683.9 4692,3642.83 4696.2,3638.63 4715.8,3638.63 4720,3642.83 4720,3679.7 4724.2,3683.9 4740,3683.9 FPGA.32@5061.26,3683.9
A13: FPGA.34 SRAM.35 | length 863
  Top Layer w8: SRAM.35@4411.5,3765.63 4445,3765.63 4605.47,3605.16 4775,3605.16 4784.8,3605.16 4789,3609.36 4789,3641.34 4793.2,3645.54 4812.8,3645.54 4817,3641.34 4817,3605.16 4817,3568.98 4821.2,3564.78 4840.8,3564.78 4845,3568.98 4845,3600.96 4849.2,3605.16 4905,3605.16 FPGA.34@5061.26,3605.16
A14: FPGA.36 SRAM.34 | length 863
  Top Layer w8: SRAM.34@4411.5,3734.13 4445,3734.13 4652.72,3526.42 4880,3526.42 4889.8,3526.42 4894,3530.62 4894,3557.7 4898.2,3561.9 4917.8,3561.9 4922,3557.7 4922,3526.42 4922,3495.13 4926.2,3490.93 4945.8,3490.93 4950,3495.13 4950,3522.22 4954.2,3526.42 4965,3526.42 FPGA.36@5061.26,3526.42
A15: FPGA.125 SRAM.21 | length 863
  Top Layer w8: FPGA.125@3250.24,3447.68 3325,3447.68 3334.8,3447.68 3339,3451.88 3339,3476.15 3343.2,3480.35 3362.8,3480.35 3367,3476.15 3367,3451.88 3371.2,3447.68 3440,3447.68 3617.6,3447.68 3904.06,3734.13 SRAM.21@3939.06,3734.13
A16: FPGA.123 SRAM.20 | length 863
  Top Layer w8: FPGA.123@3250.24,3526.42 3435,3526.42 3444.8,3526.42 3449,3530.62 3449,3564.68 3453.2,3568.88 3472.8,3568.88 3477,3564.68 3477,3530.62 3481.2,3526.42 3580,3526.42 3662.95,3526.42 3902.17,3765.63 SRAM.20@3939.06,3765.63
A17: FPGA.121 SRAM.19 | length 863
  Top Layer w8: FPGA.121@3250.24,3605.16 3320,3605.16 3329.8,3605.16 3334,3609.36 3334,3628.31 3338.2,3632.51 3357.8,3632.51 3362,3628.31 3362,3605.16 3362,3582 3366.2,3577.8 3385.8,3577.8 3390,3582 3390,3600.96 3394.2,3605.16 3490,3605.16 3714.57,3605.16 3906.54,3797.13 SRAM.19@3939.06,3797.13
A18: FPGA.119 SRAM.18 | length 863
  Top Layer w8: FPGA.119@3250.24,3683.9 3625,3683.9 3634.8,3683.9 3639,3688.1 3639,3711.94 3643.2,3716.14 3662.8,3716.14 3667,3711.94 3667,3683.9 3667,3655.85 3671.2,3651.65 3690.8,3651.65 3695,3655.85 3695,3679.7 3699.2,3683.9 3760.2,3683.9 3904.92,3828.62 SRAM.18@3939.06,3828.62
A19: FPGA.117 SRAM.17 | length 863
  Top Layer w8: FPGA.117@3250.24,3762.64 3526.62,3762.64 3536.42,3762.64 3540.62,3766.84 3540.62,3795.58 3544.82,3799.78 3564.42,3799.78 3568.62,3795.58 3568.62,3762.64 3568.62,3729.7 3572.82,3725.5 3592.42,3725.5 3596.62,3729.7 3596.62,3758.44 3600.82,3762.64 3715,3762.64 3812.64,3762.64 3910.12,3860.12 SRAM.17@3939.06,3860.12
BLUE0: FPGA.51 LCD_0.9 | length 2495.3
  Bottom Layer w8: LCD_0.9@4000,1350 4300,1650 4306.93,1656.93 4306.93,1662.87 4241.34,1728.46 4241.34,1734.4 4255.2,1748.26 4261.14,1748.26 4326.73,1682.67 4332.67,1682.67 4405,1755 4585,1935 4659.83,2009.83 4665.77,2009.83 4685.28,1990.32 4691.22,1990.32 4705.08,2004.18 4705.08,2010.12 4685.57,2029.63 4685.57,2035.57 4692.5,2042.5 4835,2185 5115,2185 5210,2280 5210,2826.5 FPGA.51@5140,2896.5
BLUE1: FPGA.49 LCD_0.10 | length 2497.7
  Bottom Layer w8: LCD_0.10@4100,1350 4100,1365 4225,1490 4302.33,1567.33 4308.27,1567.33 4321.09,1554.51 4327.03,1554.51 4340.89,1568.37 4340.89,1574.31 4328.07,1587.13 4328.07,1593.07 4335,1600 4535,1800 4541.93,1806.93 4541.93,1812.87 4529.43,1825.37 4529.43,1831.31 4543.29,1845.17 4549.23,1845.17 4564.7,1829.7 4595.17,1799.23 4601.11,1799.23 4614.97,1813.09 4614.97,1819.03 4584.5,1849.5 4569.03,1864.97 4569.03,1870.91 4582.89,1884.77 4588.83,1884.77 4601.33,1872.27 4607.27,1872.27 4642.5,1907.5 4885,2150 5125,2150 5235,2260 5235,2880.24 FPGA.49@5140,2975.24
BLUE2: FPGA.47 LCD_0.11 | length 2495.3
  Bottom Layer w8: LCD_0.11@4200,1350 4232.5,1382.5 4317.33,1467.33 4323.27,1467.33 4330.74,1459.86 4336.68,1459.86 4350.54,1473.72 4350.54,1479.66 4343.07,1487.13 4343.07,1493.07 4350,1500 4480,1630 4486.93,1636.93 4486.93,1642.87 4458.82,1670.98 4458.82,1676.92 4472.68,1690.78 4478.62,1690.78 4509.7,1659.7 4540.78,1628.62 4546.72,1628.62 4560.57,1642.48 4560.57,1648.42 4532.47,1676.53 4532.47,1682.47 4617.5,1767.5 4960,2110 5125,2110 5260,2245 5260,2933.98 FPGA.47@5140,3053.98
BLUE3: FPGA.45 LCD_0.12 | length 2493.8
  Bottom Layer w8: LCD_0.12@4300,1350 4315,1350 4755,1790 4761.93,1796.93 4761.93,1802.87 4736.02,1828.78 4736.02,1834.72 4749.88,1848.58 4755.82,1848.58 4784.7,1819.7 4786.66,1817.73 4792.6,1817.73 4806.46,1831.59 4806.46,1837.53 4804.5,1839.5 4775.62,1868.38 4775.62,1874.32 4789.48,1888.18 4795.42,1888.18 4821.33,1862.27 4827.27,1862.27 4865,1900 4990,2025 5085,2025 5290,2230 5290,2982.72 FPGA.45@5140,3132.72
BLUE4: FPGA.43 LCD_0.13 | length 2517.6
  Bottom Layer w8: LCD_0.13@4397.5,1352.5 4400,1355 LCD_0.13@4400,1373.83 ; LCD_0.13@4400,1350 4622.5,1572.5 4678.51,1628.51 4678.51,1634.45 4659.47,1653.49 4659.47,1659.43 4673.33,1673.29 4679.27,1673.29 4701.28,1651.28 4730.79,1621.77 4736.73,1621.77 4750.59,1635.63 4750.59,1641.56 4724.05,1668.11 4724.05,1674.05 4730.98,1680.98 5025,1975 5075,1975 5320,2220 5320,3035 FPGA.43@5141.77,3213.23
BLUE5: FPGA.41 LCD_0.14 | length 2495.3
  Bottom Layer w8: LCD_0.14@4500,1350 4950,1800 5010.03,1860.03 5010.03,1865.97 4992.85,1883.16 4992.85,1889.1 5006.71,1902.96 5012.65,1902.96 5032.8,1882.8 5052.96,1862.65 5058.9,1862.65 5072.76,1876.5 5072.76,1882.44 5055.57,1899.63 5055.57,1905.57 5062.5,1912.5 5350,2200 5350,3080.2 FPGA.41@5140,3290.2
BLUE6: FPGA.39 LCD_0.15 | length 2497.2
  Bottom Layer w8: LCD_0.15@4600,1350 4927.5,1677.5 4947.33,1697.33 4953.27,1697.33 4969.72,1680.89 4975.65,1680.89 4989.51,1694.75 4989.51,1700.69 4973.07,1717.13 4973.07,1723.07 4980,1730 5045,1795 5375,2125 5375,3145 5151.06,3368.94 FPGA.39@5140,3368.94
BLUE7: FPGA.37 LCD_0.16 | length 2495.3
  Bottom Layer w8: LCD_0.16@4700,1350 5400,2050 5400,3187.68 FPGA.37@5140,3447.68
CLK_pixel: FPGA.52 LCD_1.16 | length 2495.3
  Bottom Layer w8: LCD_1.16@4700,2250 4450,2500 4443.07,2506.93 4437.13,2506.93 4351.76,2421.56 4345.82,2421.56 4331.97,2435.42 4331.97,2441.36 4420.3,2529.7 4451.14,2560.53 4451.14,2566.47 4437.28,2580.33 4431.34,2580.33 4400.5,2549.5 4312.17,2461.16 4306.23,2461.16 4292.37,2475.02 4292.37,2480.96 4380.7,2569.3 4411.54,2600.13 4411.54,2606.07 4397.68,2619.93 4391.74,2619.93 4363.87,2592.07 4357.93,2592.07 4160,2790 4160,2860 4196.5,2896.5 4305,2896.5 4423.8,2896.5 4428,2892.3 4428,2864.71 4432.2,2860.51 4451.8,2860.51 4456,2864.71 4456,2892.3 4460.2,2896.5 4470,2896.5 FPGA.52@5061.26,2896.5
DAC_CS: U1.36 U2.1 | length 5845.7
  Top Layer w8: U1.36@6770,3318.58 v1(6887,3318.58)
  Bottom Layer w8: U2.1@2685,5195 2743,5137 6348,5137 6744,4741 6744,3743 6801,3686 6801,3404.58 v1(6887,3318.58)
DAC_DIN: U1.38 U2.3 | length 6209
  Top Layer w8: U2.3@2485,5195 2442,5152 2442,4686 2525,4603 v1(2525,3489) ; v1(6517.05,3244) 6631,3357.95 U1.38@6770,3357.95
  Bottom Layer w8: v1(2525,3489) 5240.96,3489 5538.96,3191 6416.04,3191 6485.04,3260 6501.05,3260 v1(6517.05,3244)
DAC_SCK: U1.37 U2.2 | length 5143.9
  Top Layer w8: v1(6586,3242) 6682.27,3338.27 U1.37@6770,3338.27
  Bottom Layer w8: U2.2@2585,5195 2705,5075 3592,5075 3950,4717 3950,4626.69 5011.35,3565.35 5188.65,3565.35 5546,3208 6409,3208 6478,3277 6551,3277 v1(6586,3242)
DE: FPGA.53 LCD_1.20 | length 2495.3
  Bottom Layer w8: LCD_1.20@5100,2250 5180,2330 5180,2360.8 5175.8,2365 5154.15,2365 5149.95,2369.2 5149.95,2388.8 5154.15,2393 5180,2393 5184.2,2393 5188.4,2397.2 5188.4,2416.8 5184.2,2421 5180,2425.2 5180,2435 5180,2470 5180,2538.8 5175.8,2543 4772.39,2543 4768.19,2547.2 4768.19,2566.8 4772.39,2571 5180,2571 5184.2,2575.2 5184.2,2594.8 5180,2599 4722.55,2599 4718.35,2603.2 4718.35,2622.8 4722.55,2627 5180,2627 5184.2,2631.2 5184.2,2650.8 5180,2655 5149.37,2655 5145.17,2659.2 5145.17,2678.8 5149.37,2683 5180,2683 5184.2,2683 5188.4,2687.2 5188.4,2706.8 5184.2,2711 5180,2715.2 5180,2725 5180,2777.76 FPGA.53@5140,2817.76
FPGA_MISO: FPGA.35 U1.79 | length 1467.8
  Top Layer w8: FPGA.35@5140,3526.42 5168.59,3555.01 5250,3555.01 5259.8,3555.01 5264,3559.21 5268.2,3563.41 5287.8,3563.41 5292,3559.21 5292,3555.01 5292,3410.18 5296.2,3405.98 5315.8,3405.98 5320,3410.18 5320,3550.81 5324.2,3555.01 5385,3555.01 5410,3555.01 5420,3555.01 5453.8,3555.01 5458,3550.81 5458,3502.29 5462.2,3498.09 5481.8,3498.09 5486,3502.29 5486,3550.81 5490.2,3555.01 5500,3555.01 5687.64,3555.01 5704.63,3572 5886.5,3572 5921.32,3537.18 6107,3537.18 6109.07,3535.12 U1.79@6169.61,3535.12
FPGA_MOSI: FPGA.33 U1.78 | length 1473.6
  Top Layer w8: FPGA.33@5140,3605.16 5156.85,3588.31 5220,3588.31 5229.8,3588.31 5234,3592.51 5234,3638.14 5238.2,3642.34 5257.8,3642.34 5262,3638.14 5262,3588.31 5266.2,3584.11 5285.8,3584.11 5290,3588.31 5290,3584.61 5293.7,3588.31 5305,3588.31 5340,3588.31 5349.8,3588.31 5354,3592.51 5354,3655.59 5358.2,3659.79 5377.8,3659.79 5382,3655.59 5382,3588.31 5382,3583.32 5386.2,3579.12 5405.8,3579.12 5410,3583.32 5410,3588.31 5410,3655.59 5414.2,3659.79 5433.8,3659.79 5438,3655.59 5438,3588.31 5438,3583.32 5442.2,3579.12 5461.8,3579.12 5466,3583.32 5466,3584.11 5470.2,3588.31 5515,3588.31 5588.8,3588.31 5593,3584.11 5593,3580.07 5597.2,3575.87 5616.8,3575.87 5621,3580.07 5621,3584.11 5625.2,3588.31 5635,3588.31 5688.31,3588.31 5689,3589 5903.5,3589 5937.7,3554.8 U1.78@6169.61,3554.8
FPGA_SCLK: FPGA.31 U1.77 | length 1467.8
  Top Layer w8: FPGA.31@5140,3683.9 5260,3683.9 5269.8,3683.9 5274,3688.1 5274,3821.57 5278.2,3825.77 5297.8,3825.77 5302,3821.57 5302,3688.1 5306.2,3683.9 5385,3683.9 5394.8,3683.9 5399,3688.1 5399,3736.61 5403.2,3740.81 5422.8,3740.81 5427,3736.61 5427,3688.1 5431.2,3683.9 5540,3683.9 5560,3683.9 5638.8,3683.9 5643,3679.7 5643,3675.66 5647.2,3671.46 5666.8,3671.46 5671,3675.66 5671,3679.7 5675.2,3683.9 5685,3683.9 5976.59,3683.9 6086,3574.49 U1.77@6169.61,3574.49
FPGA_SS: FPGA.29 U1.68 | length 1453.8
  Top Layer w8: U1.68@6371.38,3658.15 v1(6371.38,3744)
  Bottom Layer w8: FPGA.29@5140,3762.64 5225.63,3848.27 6085.94,3848.27 6104.08,3830.13 6365.36,3830.13 6384.69,3810.8 6384.69,3783.46 6371.38,3770.14 v1(6371.38,3744)
GND: "3V3 TP.2" "5V TP.2" "Power LED.2" "Power Switch.2" "SW A LED.2" "SW A.2" "SW B LED.2" "SW B.2" "SW DOWN LED.2" "SW DOWN.2" "SW LEFT LED.2" "SW LEFT.2" "SW RIGHT LED.2" "SW RIGHT.2" "SW UP LED.2" "SW UP.2" "Touch Controller.10" BATTERY.2 Boost.3 Boost.4 Boost.5 Boost.8 Boost.11 Buck.2 C1.1 C2.1 C3.1@6275,1333.74 C3.1@8927.76,2921.97 C3.2@8585.63,1235.2 C4.1@6110,1251.26 C4.1@7094.37,3496.06 C4.2@8450,1345 C5.1 C6.2 C7.1 C8.1 C9.1 C10.1 C13.2 Comparator.4 FPGA.23 FPGA.112 J1.2 J1.2A J1.2B J1.3 J1.3A J1.3B LCD_1.2 LS1.2 MCU.2 POT.1 Q2.3 R2.2 R6.1 R10.1 R14.1 SRAM.5 SRAM.26 SRAM.32 SRAM.41 SRAM.53 U1.15 U1.40 U1.43 U1.72 U1.82 U1.84 U2.7 U3.2 U3.4 | length 6100.4
  Top Layer w9.45: U1.72@6292.64,3658.15 6292.64,3739.64 6305,3752
  Top Layer w11: SRAM.26@3939.06,3576.65 SRAM.26@3939.4,3577 ; SRAM.5@3939.06,4238.07 v1(4015,4238.07) ; v1(4303,3712) 4343.86,3671.14 SRAM.32@4411.5,3671.14 ; v1(4303,3951) 4306.61,3954.61 SRAM.41@4411.5,3954.61
  Top Layer w15: 5690,3130 5704.63,3130 ; MCU.2@6115,4220 6290,4045 C8.1@6290,3963.74 6297,3963.74 6336.03,3924.71 6336.03,3850.61 6305,3819.58 6305,3752 ; C10.1@6266.06,2737.01 C9.1@6386.06,2737.01 C6.2@6605,2737.01
  Bottom Layer w15: R14.1@2179.37,4915 2245,4915 2340,4820 2510,4820 U2.7@2579.37,4889.37 ; C13.2@2579.37,4710 U2.7@2579.37,4889.37 ; U2.7@2585,4895 U2.7@2579.37,4889.37 ; v1(4015,4238.07) 4015,4253.07 v1(4110,4348.07) ; v1(4053,3577) 4055,3575 4166,3575 v1(4303,3712) v1(4303,3951) ; v1(6006,1246.26) 6105,1246.26 C4.1@6110,1251.26 6151.26,1251.26 6233.74,1333.74 C3.1@6275,1333.74 6431.26,1333.74 6518.74,1246.26 C2.1@6635,1246.26 C1.1@6780,1246.26 ; 8275,3200 8360,3285 8766,3285 8788,3263 8788,3211.09 C2.1@8791.5,3207.6 ; C4.2@8450,1345 8450,1305 8519.8,1235.2 C3.2@8585.63,1235.2 ; Boost.8@8600.43,1378.58 Boost.8@8600.43,1377.4 v1(8550,1377.4) 8520,1407.4 8520,1458 8560,1498 8633,1498 8682,1449 8682,1442 ; Boost.11@8651.61,1652.99 8651.61,1593.39 8670,1575 8694,1575 v1(8700,1569) ; Boost.5@8677.2,1377.4 8677.2,1437.2 8682,1442 ; v1(8690,1889) 8690,1855.51 8720.32,1825.2 R10.1@8761.5,1825.2 ; Boost.4@8702.8,1377.4 8702.8,1440.2 8701,1442 ; Boost.3@8728.39,1377.4 8728.39,1433.61 8720,1442 8701,1442 ; Buck.2@8805,2927.6 8922.13,2927.6 C3.1@8927.76,2921.97 9231.97,2921.97 9283.94,2870 9375,2870 9415.63,2910.63 9415.63,2950 ; Q2.3@9845,2820 9888.74,2776.26 R6.1@9888.74,2610 ; 8682,1442 8701,1442